# Altium PCB FAFMACMU_ControlPanel-V3-031115.PcbDoc (part 2 of 3)
Units mm, origin at the board's own origin, x right, y up, seen from the top; angles counter-clockwise.
Board outline 264 x 75.64 mm, 2 copper layers (Top Layer, Bottom Layer), stack 1.66 mm thick; 185 components, 162 nets, 766 pads, 792 vias.
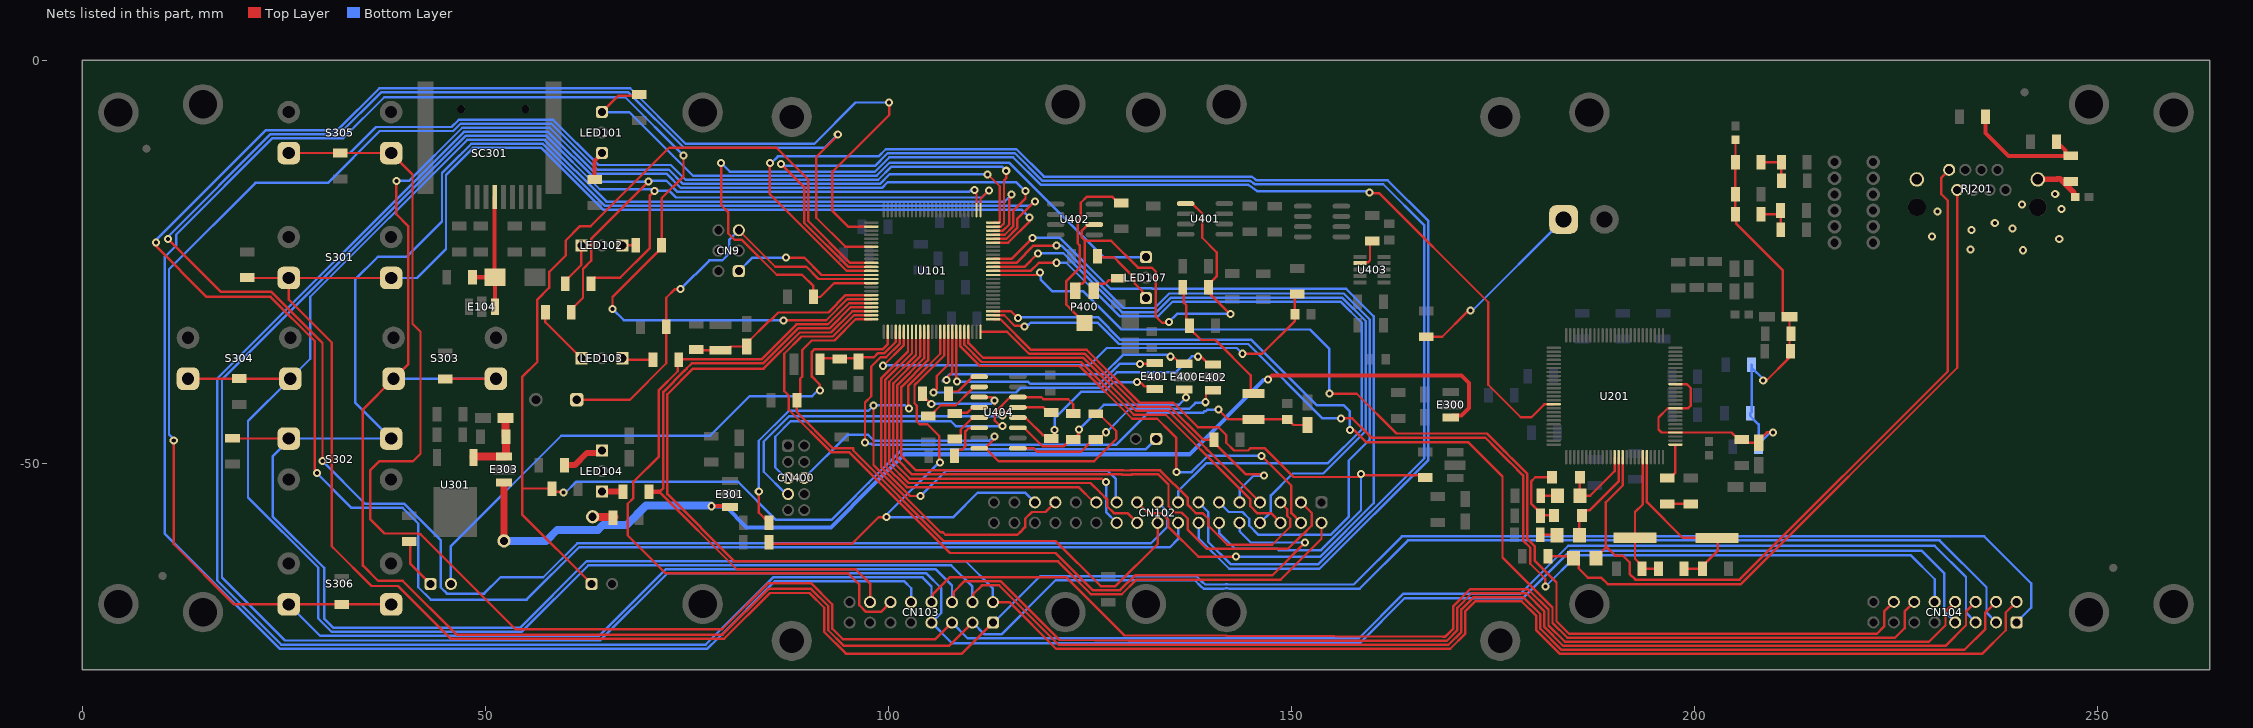
[diagram p2: the nets of this part, all layers, seen from the top]

## Via types
v1: diameter 1, hole 0.5, Top Layer to Bottom Layer, tented both sides, 636 vias
v2: diameter 1, hole 0.5, Top Layer to Bottom Layer, 146 vias
v3: diameter 1.2, hole 0.7, Top Layer to Bottom Layer, tented top, 9 vias
v4: diameter 1.2, hole 0.7, Top Layer to Bottom Layer, 1 vias

## Nets (pads, with @x,y where several pads share a name; then routed paths per layer and width w, separated by ;. In a path a pad name is that pad's centre, name@x,y a point inside that pad or via, vN(x,y) a via of type N, cw(c..) or ccw(c..) an arc to the next point about the centre after c; other vN are vias at no path point) (continued)
GNDA: C212.1 C213.1 C214.1 C218.2 C219.1 C222.2 C223.1 C224.1 C225.1 C226.1 C227.1 FT202.2 U201.4 U201.10 U201.16 | length 75.8
  Top Layer w0.3: U201.16@197.69,-40.21 199.08,-40.21 199.6,-40.73 199.6,-42.86 199.25,-43.21 U201.10@197.69,-43.21 196.733,-43.21 195.58,-44.363 195.58,-45.82 195.97,-46.21 U201.4@197.69,-46.21 204.66,-46.21 205.55,-47.1 C219.1@205.9,-47.1 206.28,-47.48 C218.2@208.03,-47.48 208.03,-47.2 209.03,-46.2 v2(209.77,-46.2) ; FT202.2@205.13,-9.9 205.13,-12.66 C225.1@205.12,-12.67 C226.1@205.12,-16.66 C227.1@205.12,-19.11 205.204,-19.194 205.204,-20.284 211.012,-26.092 211.012,-31.4 211.462,-31.85 C222.2@211.83,-31.85 211.83,-36.908 208.888,-39.85 208.822,-39.784 v2(208.574,-39.784)
  Bottom Layer w0.3: C212.1@207.129,-37.793 C212.1@207.129,-38.143 ; C214.1@208,-47.99 C214.1@208,-47.64 ; v2(208.574,-39.784) 208.574,-39.588 C212.1@207.129,-38.143 ; v2(209.77,-46.2) 209.44,-46.2 C214.1@208,-47.64 ; C212.1@207.129,-38.143 207.129,-43.681 206.94,-43.87 206.94,-44.14 208,-45.2 C214.1@208,-47.64
NetC100_2: C100.2 C115.1 L100.2 U101.5 | length 73.5
  Top Layer w0.3: v2(97.14,-47.45) 97.14,-42.49 97.91,-41.72 97.91,-38.039 99.079,-36.87 99.764,-36.87 101.47,-35.164 U101.5@101.47,-33.72 ; v2(141,-43.38) 142.2,-44.58 149.51,-44.58 C115.1@149.54,-44.61 149.64,-44.61 150.31,-45.28 C100.2@152.04,-45.28
  Bottom Layer w0.3: v2(97.14,-47.45) 97.274,-47.584 97.91,-47.584 98.066,-47.74 128.293,-47.74 132.263,-43.77 139.057,-43.77 139.276,-43.55 139.43,-43.55 139.6,-43.38 v2(141,-43.38)
NetC101_1: C101.1 C102.1 L101.2 U101.4 | length 11.7
  Top Layer w0.3: L101.2@91.5,-37.32 91.8,-37.02 93.96,-37.02 96.09,-37.02 96.21,-36.9 98.22,-36.9 98.75,-36.37 99.557,-36.37 100.97,-34.957 U101.4@100.97,-33.72
NetC103_1: C103.1 C104.2 L102.2 U101.94 | length 24.8
  Top Layer w0.3: C104.2@76.21,-35.93 76.28,-36 L102.2@79.21,-36 80.01,-36 80.47,-35.54 C103.1@82.46,-35.54 82.46,-35.14 85.3,-32.3 85.4,-32.3 86.38,-31.32 92.588,-31.32 94.738,-29.17 U101.94@97.92,-29.17
NetC215_1: C215.1 R210.1 U201.95 X201.1 | length 16.6
  Top Layer w0.3: U201.95@193.64,-49.26 193.64,-55.11 192.67,-56.08 X201.1@192.67,-59.26 192.67,-61.88 193.55,-62.76 C215.1@193.55,-63.11 R210.1@195.56,-63.11
NetC216_1: C216.1 R210.2 U201.96 X201.2 | length 23
  Top Layer w0.3: U201.96@194.14,-49.26 194.14,-54.84 198.585,-59.285 X201.2@202.83,-59.285 202.92,-59.375 202.92,-60.9 201.06,-62.76 C216.1@201.06,-63.11 R210.2@198.76,-63.11
NetC225_2: C225.2 R211.2 R212.2 | length 4.8
  Top Layer w0.3: C225.2@208.32,-12.67 R212.2@210.82,-12.67 210.82,-14.95 R211.2@210.84,-14.97
NetC227_2: C227.2 R213.1 R214.1 | length 5
  Top Layer w0.3: C227.2@208.32,-19.11 210.33,-19.11 R213.1@210.73,-18.71 ; R213.1@210.73,-18.67 R213.1@210.73,-18.71 ; R214.1@210.74,-21.05 210.73,-21.04 R213.1@210.73,-18.71
NetC228_1: C228.1 FT204.2 RJ201.9 RJ201.10 | length 5.9
  Top Layer w0.7: RJ201.9@242.64,-14.82 242.64,-14.88 242.735,-14.785 245.015,-14.785 245.05,-14.75 245.4,-14.75 247.09,-16.44 247.09,-16.82 247.24,-16.97 FT204.2@247.29,-16.97
  other v1: 240.8,-23.6 234.3,-23.5 245.3,-22.2 229.5,-21.9 234.4,-21.1 239.5,-20.9 237.3,-20.2 230.2,-18.8 245.6,-18.5 240.7,-17.9 244.8,-16.6
NetC228_2: C228.2 R215.1 R216.1 | length 15.8
  Top Layer w0.5: R215.1@236.14,-7.01 236.14,-9.03 238.99,-11.88 C228.2@246.36,-11.88 ; R216.1@245.14,-10.31 246.06,-11.23 246.06,-11.58 C228.2@246.36,-11.88 ; C228.2@246.71,-11.88 C228.2@246.36,-11.88
NetC303_1: C303.1 C304.2 E303.3 U301.1 | length 8.9
  Top Layer w1: U301.1@48.585,-49.295 48.585,-49.2 52.325,-49.2 52.61,-49.2 52.61,-47.13 52.62,-47.12 C304.2@52.62,-46.73 52.57,-46.68 52.57,-46.23 52.53,-46.19 C303.1@52.53,-44.42
NetC310_1: C310.1 C311.1 E104.3 SC301.4 | length 16.4
  Top Layer w0.5: C310.1@48.45,-26.95 C311.1@51.22,-26.95 ; SC301.4@51.2,-17 51.2,-26.93 C311.1@51.22,-26.95 ; E104.3@51.21,-30.61 51.21,-26.96 C311.1@51.22,-26.95
NetC314_2: C314.2 CN103.1 CN104.1 S301.1 U101.45 | length 392.3
  Top Layer w0.3: C314.2@20.51,-27 C314.2@20.86,-27 ; C314.2@20.86,-27.04 S301.1@25.65,-27.04 ; S301.1@38.35,-27.04 S301.1@25.65,-27.04 ; CN103.1@113.01,-69.8 109.16,-73.65 94.776,-73.65 92.08,-70.954 92.08,-67.95 90.25,-66.12 85.344,-66.12 79.674,-71.79 45.73,-71.79 39.19,-65.25 35.906,-65.25 31.16,-60.504 30.98,-60.324 30.98,-35.06 25.65,-29.73 S301.1@25.65,-27.04 ; U101.45@113.02,-22.67 114.886,-22.67 117.54,-20.016 v2(117.54,-19.53)
  Bottom Layer w0.3: S301.1@25.37,-26.77 25.645,-27.045 S301.1@25.65,-27.04 ; S301.1@38.35,-27.04 41.58,-27.04 45.16,-23.46 45.16,-14.245 46.935,-12.47 47.377,-12.029 48.496,-10.91 56.984,-10.91 64.635,-18.56 116.57,-18.56 v2(117.54,-19.53) ; CN103.1@113.01,-69.8 113.12,-69.8 118.87,-64.05 138.262,-64.05 139.025,-64.814 139.378,-65.07 141.629,-65.07 cw(c142,-68.5) 142.356,-65.068 cw(c142,-68.5) 142.371,-65.07 157.781,-65.07 163.753,-59.098 235.992,-59.098 241.81,-64.916 241.81,-67.96 CN104.1@240.01,-69.76
NetC315_2: C315.2 CN103.2 CN104.2 S302.1 U101.46 | length 404.4
  Top Layer w0.3: C315.2@18.32,-46.93 C315.2@18.67,-46.93 18.7,-46.96 S302.1@25.65,-46.96 ; CN103.2@113.01,-67.26 115.06,-67.26 120.84,-73.04 169.737,-73.04 171.63,-71.147 171.63,-68.36 172.83,-67.16 178.62,-67.16 180.43,-68.97 180.43,-70.76 183.35,-73.68 235.73,-73.68 238.67,-70.74 238.67,-68.56 CN104.2@240.01,-67.22 ; U101.46@113.02,-22.17 114.678,-22.17 116.05,-20.798 116.05,-19.676 118.166,-17.56 v2(118.21,-17.56)
  Bottom Layer w0.3: CN103.2@113.01,-67.26 113.01,-65.57 109.63,-62.19 62.591,-62.19 54.331,-70.45 31.19,-70.45 30.035,-69.295 30.035,-62.997 23.65,-56.613 23.65,-49.18 25.87,-46.96 S302.1@38.35,-46.96 33.88,-42.49 33.88,-27.23 36.69,-24.42 40.263,-24.42 44.66,-20.023 44.66,-14.038 46.728,-11.97 47.17,-11.529 48.289,-10.41 57.192,-10.41 64.842,-18.06 117.61,-18.06 118.11,-17.56 v2(118.21,-17.56)
NetC316_2: C316.2 CN103.3 CN104.3 S303.1 U101.47 | length 389
  Top Layer w0.3: v2(39,-15) 39,-19.14 40.497,-20.637 40.497,-37.693 S303.1@38.65,-39.54 34.84,-43.35 34.84,-62.72 36.72,-64.6 39.77,-64.6 46.46,-71.29 79.467,-71.29 85.147,-65.61 90.447,-65.61 92.58,-67.743 92.58,-70.747 94.483,-72.65 107.62,-72.65 CN103.3@110.47,-69.8 ; C316.2@45.03,-39.54 C316.2@45.06,-39.57 45.09,-39.54 S303.1@51.35,-39.54 ; U101.47@113.02,-21.67 114.471,-21.67 115.55,-20.591 115.55,-18.67 117.05,-17.17 v2(117.05,-16.27)
  Bottom Layer w0.3: S303.1@38.65,-39.54 S303.1@51.35,-39.54 ; v2(39,-15) 40.577,-15 47.167,-8.41 58.02,-8.41 63.7,-14.09 72.516,-14.09 74.286,-15.86 99.24,-15.86 99.96,-15.14 115.86,-15.14 116.99,-16.27 v2(117.05,-16.27) ; CN103.3@110.47,-69.8 110.498,-69.8 111.95,-71.252 114.088,-71.252 120.79,-64.55 138.055,-64.55 138.818,-65.314 138.905,-65.4 139.171,-65.57 141.657,-65.57 cw(c142,-68.5) 142.327,-65.568 cw(c142,-68.5) 142.343,-65.57 158.518,-65.57 164.49,-59.598 230.452,-59.598 236.27,-65.416 236.27,-68.56 CN104.3@237.47,-69.76
NetC317_2: C317.2 CN103.4 CN104.4 S304.1 U101.48 | length 395.4
  Top Layer w0.3: S304.1@13.15,-39.54 C317.2@19.17,-39.54 ; C317.2@19.17,-39.53 C317.2@19.52,-39.53 19.53,-39.54 S304.1@25.85,-39.54 ; CN103.4@110.47,-67.26 110.564,-67.166 110.564,-66.256 111.64,-65.18 113.79,-65.18 121.15,-72.54 169.53,-72.54 171.13,-70.94 171.13,-68.153 172.623,-66.66 178.83,-66.66 180.93,-68.76 180.93,-70.553 183.557,-73.18 233.52,-73.18 236.13,-70.57 236.13,-68.56 CN104.4@237.47,-67.22 ; U101.48@113.02,-21.17 114.264,-21.17 115.05,-20.384 115.05,-17.26 115.33,-16.98 v2(115.33,-16.71)
  Bottom Layer w0.3: CN103.4@110.47,-67.26 110.47,-65.32 107.84,-62.69 62.798,-62.69 54.538,-70.95 30.983,-70.95 29.31,-69.277 29.31,-62.98 20.59,-54.26 20.59,-44.8 S304.1@25.85,-39.54 28.321,-37.069 28.321,-29.377 47.788,-9.91 57.399,-9.91 65.049,-17.56 114.48,-17.56 v2(115.33,-16.71)
NetC318_2: C318.2 CN103.5 CN104.5 S305.1 U101.49 | length 392.3
  Top Layer w0.3: S305.1@25.65,-11.54 C318.2@32.02,-11.54 S305.1@38.35,-11.54 40.997,-14.187 40.997,-32.727 41.99,-33.72 41.99,-48.85 41.04,-49.8 36.85,-49.8 35.77,-50.88 35.77,-56.99 37.52,-58.74 41.676,-58.74 41.776,-58.84 42.01,-58.84 42.56,-59.39 53.784,-70.614 79.436,-70.614 85.16,-64.89 90.434,-64.89 93.08,-67.536 93.08,-70.54 94.385,-71.845 105.885,-71.845 CN103.5@107.93,-69.8 ; U101.49@113.02,-20.67 113.977,-20.67 114.38,-20.267 114.38,-14.935 114.66,-14.655 v2(114.66,-13.74)
  Bottom Layer w0.3: S305.1@25.65,-11.54 33.245,-11.54 36.478,-8.307 45.855,-8.307 46.752,-7.41 58.453,-7.41 64.063,-13.02 73.04,-13.02 74.88,-14.86 98.783,-14.86 100.413,-13.23 114.15,-13.23 v2(114.66,-13.74) ; CN103.5@107.93,-69.8 109.882,-71.752 158.388,-71.752 163.905,-66.235 178.425,-66.235 184.39,-60.27 229.84,-60.27 233.73,-64.16 233.73,-68.56 CN104.5@234.93,-69.76
NetC319_2: C319.2 CN103.6 CN104.6 S306.1 U101.50 | length 417.6
  Top Layer w0.3: v2(11.38,-47.2) 11.38,-60.07 18.85,-67.54 S306.1@25.65,-67.54 32.2,-67.54 C319.2@32.21,-67.53 32.22,-67.54 S306.1@38.35,-67.54 ; CN103.6@107.93,-67.26 108.16,-67.03 108.16,-65.96 109.44,-64.68 113.997,-64.68 121.269,-71.953 121.392,-71.954 129.84,-72.04 169.323,-72.04 170.63,-70.733 170.63,-67.946 172.416,-66.16 179.193,-66.16 181.43,-68.397 181.43,-70.346 183.764,-72.68 231.167,-72.68 233.73,-70.117 233.73,-68.42 CN104.6@234.93,-67.22 ; v2(112.336,-14.18) 112.37,-14.18 113.85,-15.66 113.85,-20.09 113.77,-20.17 U101.50@113.02,-20.17
  Bottom Layer w0.3: v2(11.38,-47.2) 11.38,-47.037 10.79,-46.447 10.79,-25.954 21.504,-15.24 30.51,-15.24 36.943,-8.807 46.063,-8.807 46.96,-7.91 58.246,-7.91 63.926,-13.59 72.79,-13.59 74.56,-15.36 98.99,-15.36 100.204,-14.146 112.303,-14.146 v2(112.336,-14.18) ; S306.1@25.65,-67.54 29.56,-71.45 64.143,-71.45 72.403,-63.19 105.94,-63.19 107.93,-65.18 CN103.6@107.93,-67.26
NetC403_2: C403.2 R402.1 U101.6 | length 62.7
  Top Layer w0.3: v2(99.362,-37.93) 99.411,-37.93 101.97,-35.371 U101.6@101.97,-33.72 ; v2(143.97,-36.44) 146.398,-36.44 150.47,-32.368 C403.2@150.47,-31.62 ; C403.2@150.47,-31.52 C403.2@150.47,-31.62 ; R402.1@150.47,-29.083 C403.2@150.47,-31.62
  Bottom Layer w0.3: v2(99.362,-37.93) 99.432,-37.86 125,-37.86 127.13,-35.73 143.26,-35.73 v2(143.97,-36.44)
NetC404_1: C404.1 U403.2 | length 3.9
  Top Layer w0.3: U403.2@158.54,-25.21 158.64,-25.11 159.526,-25.11 159.79,-24.846 159.79,-22.73 C404.1@160.05,-22.47
NetC406_1: C406.1 R412.2 | length 23
  Top Layer w0.3: R412.2@166.79,-34.34 168.75,-34.34 171.773,-31.317 171.794,-31.317 172.061,-31.05 v2(172.25,-31.05)
  Bottom Layer w0.3: v2(172.25,-31.05) 172.53,-31.05 C406.1@183.8,-19.78
NetC408_1: C408.1 U404.3 | length 12.8
  Top Layer w0.3: C408.1@104.28,-41.42 104.28,-41.575 v2(105.36,-42.655) ; U404.3@111.31,-41.82 112.86,-41.82 113.284,-42.244 113.256,-42.271 113.256,-42.7 113.22,-42.664 v2(113.22,-42.24)
  Bottom Layer w0.3: v2(105.36,-42.655) 112.805,-42.655 v2(113.22,-42.24)
NetC408_2: C408.2 U404.1 | length 4.7
  Top Layer w0.3: C408.2@107.48,-41.42 107.78,-41.12 108.687,-41.12 109.85,-39.956 109.85,-39.94 110.51,-39.28 U404.1@111.31,-39.28
NetC409_1: C409.1 U404.2 | length 7.5
  Top Layer w0.3: C409.1@105.31,-44.05 106.53,-42.83 108.391,-42.83 110.35,-40.871 110.35,-40.71 110.51,-40.55 U404.2@111.31,-40.55
NetC410_1: C410.1 U404.5 | length 5.2
  Top Layer w0.3: C410.1@107.58,-47.13 107.93,-47.13 C410.1@108.135,-46.925 ; C410.1@108.25,-46.95 108.6,-46.95 109,-46.55 109,-45.87 110.51,-44.36 U404.5@111.31,-44.36
NetC410_2: C410.2 U404.4 | length 4
  Top Layer w0.3: C410.2@107.58,-43.93 C410.2@108.25,-43.93 ; C410.2@108.25,-43.75 109.85,-43.75 110.51,-43.09 U404.4@111.31,-43.09
NetC412_2: C412.2 U404.6 | length 5.8
  Top Layer w0.3: C412.2@108.24,-49.12 108.24,-48.77 108.64,-48.37 109.138,-48.37 109.6,-47.908 109.6,-46.07 109.983,-45.687 111.253,-45.687 U404.6@111.31,-45.63
NetCN9_1: CN9.1 U101.89 | length 18
  Top Layer w0.3: v2(87.34,-24.51) 89.6,-24.51 91.76,-26.67 U101.89@97.92,-26.67
  Bottom Layer w0.3: CN9.1@81.48,-26.2 83.17,-24.51 v2(87.34,-24.51)
NetCN9_5: CN9.5 R101.1 S101.1 U101.90 | length 53.5
  Top Layer w0.3: S101.1@61.38,-42.14 67.966,-42.14 72.48,-37.626 R101.1@72.48,-33.07 72.48,-29.5 73.55,-28.43 v2(74.27,-28.43) ; CN9.5@81.48,-21.12 86,-25.64 89.86,-25.64 91.39,-27.17 92.35,-27.17 U101.90@97.92,-27.17
  Bottom Layer w0.3: v2(74.27,-28.43) 77.84,-24.86 79.437,-24.86 80.28,-24.017 80.28,-22.32 CN9.5@81.48,-21.12
NetCN102_2: CN102.2 U101.98 | length 133.1
  Top Layer w0.3: U101.98@97.92,-31.17 95.567,-31.17 92.937,-33.8 89.047,-33.8 84.567,-38.28 75.81,-38.28 72.63,-41.46 72.63,-53.863 80.967,-62.2 121.1,-62.2 125.17,-66.27 129,-66.27 130.81,-64.46 148.71,-64.46 153.77,-59.4 CN102.2@153.77,-57.41
NetCN102_3: CN102.3 U101.11 | length 80.3
  Top Layer w0.3: U101.11@104.47,-33.72 104.47,-36.994 101.15,-40.314 101.15,-49.58 102.98,-51.41 129.001,-51.41 129.02,-51.429 130.221,-51.429 130.24,-51.41 133.55,-51.41 134.79,-52.65 134.79,-55.367 135.563,-56.14 136.417,-56.14 137.19,-56.913 137.19,-58.31 139.52,-60.64 149.616,-60.64 151.346,-58.91 151.427,-58.91 152.57,-57.767 152.57,-56.21 CN102.3@151.23,-54.87
NetCN102_4: CN102.4 U101.20 | length 59.3
  Top Layer w0.3: U101.20@108.97,-33.72 108.97,-35.534 111.396,-37.96 123.737,-37.96 130.287,-44.51 133.404,-44.51 134.97,-46.076 135.77,-46.876 v2(135.77,-51.13) ; v2(146.31,-49.1) 150.03,-52.82 150.03,-56.21 CN102.4@151.23,-57.41
  Bottom Layer w0.3: v2(135.77,-51.13) 137.652,-51.13 139.682,-49.1 v2(146.31,-49.1)
NetCN102_5: CN102.5 U101.12 | length 75.1
  Top Layer w0.3: U101.12@104.97,-33.72 104.97,-37.229 101.65,-40.549 101.65,-49.113 103.446,-50.91 129.208,-50.91 129.227,-50.929 130.014,-50.929 130.033,-50.91 133.757,-50.91 137.19,-54.343 137.19,-55.227 138.173,-56.21 139.027,-56.21 139.73,-56.913 139.73,-57.767 142.103,-60.14 147.657,-60.14 149.89,-57.907 149.89,-56.913 149.53,-56.553 149.53,-55.727 148.69,-54.887 CN102.5@148.69,-54.87
NetCN102_6: CN102.6 U101.21 | length 50.5
  Top Layer w0.3: U101.21@109.47,-33.72 109.47,-35.327 111.603,-37.46 123.944,-37.46 130.494,-44.01 134.447,-44.01 142.917,-52.48 144.95,-54.513 144.95,-55.367 145.793,-56.21 147.49,-56.21 CN102.6@148.69,-57.41
NetCN102_7: CN102.7 U101.22 | length 45.8
  Top Layer w0.3: U101.22@109.97,-33.72 109.97,-35.12 111.81,-36.96 124.23,-36.96 130.78,-43.51 134.79,-43.51 139.45,-48.17 139.45,-48.176 139.714,-48.44 139.72,-48.44 CN102.7@146.15,-54.87
NetCN102_8: CN102.8 U101.39 | length 84.6
  Top Layer w0.3: U101.39@113.02,-25.67 116.93,-25.67 v2(118.62,-23.98)
  Bottom Layer w0.3: v2(118.62,-23.98) 121.763,-23.98 122.32,-24.537 122.32,-24.581 129.009,-31.27 133.3,-31.27 135.1,-29.47 156.333,-29.47 159.26,-32.397 159.26,-46.029 153.989,-51.3 150.2,-51.3 147.49,-54.01 147.49,-56.07 CN102.8@146.15,-57.41
NetCN102_9: CN102.9 R107.1 U101.25 | length 48.1
  Top Layer w0.3: U101.25@111.47,-33.72 114.773,-33.72 117.513,-36.46 124.437,-36.46 130.987,-43.01 134.997,-43.01 139.077,-47.09 R107.1@140.45,-47.09 140.45,-47.44 144.42,-51.41 146.114,-51.41 146.13,-51.426 146.506,-51.426 v2(146.64,-51.56)
  Bottom Layer w0.3: CN102.9@143.61,-54.87 143.61,-53.31 145.36,-51.56 v2(146.64,-51.56)
NetCN102_10: CN102.10 U101.99 | length 105.5
  Top Layer w0.3: U101.99@97.92,-31.67 95.774,-31.67 93.144,-34.3 89.254,-34.3 87.12,-36.434 87.12,-41.073 87.68,-41.633 87.68,-43.38 92.98,-48.68 95.2,-48.68 107.68,-61.16 120.767,-61.16 125.377,-65.77 128.793,-65.77 130.633,-63.93 147.67,-63.93 v2(151.74,-59.86)
  Bottom Layer w0.3: CN102.10@143.61,-57.41 143.61,-58.47 145,-59.86 v2(151.74,-59.86)
NetCN102_11: CN102.11 U101.40 | length 97.7
  Top Layer w0.3: U101.40@113.02,-25.17 115.92,-25.17 118.06,-23.03 120.91,-23.03 v2(120.92,-23.02)
  Bottom Layer w0.3: v2(120.92,-23.02) 121.511,-23.02 122.82,-24.329 122.82,-24.373 129.217,-30.77 133.093,-30.77 134.893,-28.97 156.54,-28.97 159.76,-32.19 159.76,-47.09 157.14,-49.71 157.14,-56.68 154.91,-58.91 145.953,-58.91 144.81,-57.767 144.81,-56.913 143.967,-56.07 142.27,-56.07 CN102.11@141.07,-54.87
NetCN102_12: CN102.12 R106.1 U101.26 | length 88.6
  Top Layer w0.3: U101.26@113.02,-32.17 113.93,-32.17 117.72,-35.96 124.65,-35.96 131.2,-42.51 135.38,-42.51 138.438,-45.568 141.014,-45.568 141.964,-46.518 141.964,-47.49 142.914,-48.44 144.693,-48.44 144.983,-48.15 146.704,-48.15 150.284,-51.73 v2@158.67,-51.73 ; v2(158.67,-51.34) 158.859,-51.34 159.009,-51.49 R106.1@166.3,-51.49
  Bottom Layer w0.3: CN102.12@141.07,-57.41 141.07,-58.683 143.027,-60.64 148.287,-60.64 148.457,-60.81 153.717,-60.81 158.67,-55.857 v2(158.67,-51.34)
NetCN102_13: CN102.13 U101.87 | length 171
  Top Layer w0.3: v2(86.719,-12.91) 86.729,-12.91 89.59,-15.771 89.59,-20.183 95.077,-25.67 U101.87@97.92,-25.67
  Bottom Layer w0.3: v2(86.719,-12.91) 86.919,-12.91 87.139,-13.13 98.367,-13.13 99.927,-11.57 115.729,-11.57 119.119,-14.96 144.879,-14.96 144.958,-15.017 145.314,-15.273 145.35,-15.304 145.466,-15.42 161.44,-15.42 166.53,-20.51 166.53,-49.411 153.401,-62.54 142.495,-62.54 139.73,-59.775 139.73,-56.07 CN102.13@138.53,-54.87
NetCN102_14: CN102.14 U101.88 | length 173.7
  Top Layer w0.3: v2(85.33,-12.77) 85.33,-16.63 94.87,-26.17 U101.88@97.92,-26.17
  Bottom Layer w0.3: v2(85.33,-12.77) 85.516,-12.77 86.326,-11.96 98.83,-11.96 99.72,-11.07 115.936,-11.07 119.326,-14.46 145.087,-14.46 145.165,-14.517 145.524,-14.776 145.56,-14.807 145.673,-14.92 161.98,-14.92 167.03,-19.97 167.03,-49.618 153.528,-63.12 142.321,-63.12 138.53,-59.329 CN102.14@138.53,-57.41
NetCN102_15: CN102.15 U101.38 | length 91.3
  Top Layer w0.3: U101.38@113.02,-26.17 117.686,-26.17 118.706,-25.15 v2(120.883,-25.15)
  Bottom Layer w0.3: v2(120.883,-25.15) 122.106,-25.15 128.726,-31.77 133.521,-31.77 135.321,-29.97 156.126,-29.97 158.76,-32.604 158.76,-45.822 154.532,-50.05 139.439,-50.05 135.99,-53.499 CN102.15@135.99,-54.87
NetCN102_16: CN102.16 U101.77 | length 291.5
  Top Layer w0.3: v2(9.18,-22.66) 9.18,-22.7 8.974,-22.906 15.458,-29.39 23.392,-29.39 28.89,-34.888 28.89,-50.81 29.15,-51.071 v2(29.15,-51.26) ; U101.77@97.92,-20.67 95.027,-20.67 93.09,-18.733 93.09,-13.87 100.14,-6.82 v2(100.14,-5.27)
  Bottom Layer w0.3: v2(29.15,-51.26) 33.45,-55.56 39.784,-55.56 41.72,-57.496 41.72,-65.407 43.265,-66.951 55.156,-66.951 61.657,-60.45 134.98,-60.45 135.99,-59.44 CN102.16@135.99,-57.41 ; v2(100.14,-5.27) 95.98,-5.27 90.86,-10.39 74.887,-10.39 68.007,-3.51 36.893,-3.51 31.71,-8.693 22.823,-8.693 9.18,-22.336 v2(9.18,-22.66) ; v2@9.18,-22.69 v2(9.18,-22.66) ; v2@9.18,-22.69 v2(9.18,-22.66) ; v2@9.18,-22.69 8.974,-22.896 v2@9.18,-22.69
NetCN102_17: CN102.17 U101.82 | length 275.2
  Top Layer w0.3: v2(10.67,-22.19) 17.25,-28.77 23.49,-28.77 29.84,-35.12 v2(29.84,-49.76) ; v2(93.76,-9.226) 93.76,-9.352 91.09,-12.022 91.09,-19.562 94.698,-23.17 U101.82@97.92,-23.17
  Bottom Layer w0.3: v2@10.525,-22.045 23.377,-9.193 31.917,-9.193 37.1,-4.01 67.8,-4.01 74.68,-10.89 92.096,-10.89 v2(93.76,-9.226) ; v2(29.84,-49.76) 35.14,-55.06 39.991,-55.06 44.49,-59.559 44.49,-65.417 45.273,-66.2 49.886,-66.2 51.916,-64.17 57.23,-64.17 61.45,-59.95 132.607,-59.95 134.65,-57.907 134.65,-56.07 CN102.17@133.45,-54.87
NetCN102_18: CN102.18 R108.2 U101.100 | length 76.8
  Top Layer w0.3: U101.100@97.92,-32.17 95.981,-32.17 93.351,-34.8 90.539,-34.8 89.35,-35.989 89.35,-39.276 89.08,-39.546 89.08,-41.8 R108.2@88.68,-42.2 88.68,-43.673 93.187,-48.18 95.673,-48.18 95.673,-48.446 106.897,-59.67 107.163,-59.67 113.77,-59.67 120.78,-59.67 126.38,-65.27 128.216,-65.27 133.45,-60.036 CN102.18@133.45,-57.41
NetCN102_19: CN102.19 U101.41 | length 111
  Top Layer w0.3: U101.41@113.02,-24.67 115.33,-24.67 v2(117.93,-22.07) ; CN102.19@130.91,-54.87 132.25,-56.21 133.947,-56.21 134.738,-57.001 134.738,-57.855 138.503,-61.62 143.14,-61.62 v2(143.17,-61.59)
  Bottom Layer w0.3: v2(117.93,-22.07) 121.313,-22.07 127.633,-28.39 131.233,-28.39 131.283,-28.34 132.717,-28.34 132.767,-28.39 156.85,-28.39 160.26,-31.8 160.26,-54.974 153.594,-61.64 143.22,-61.64 v2(143.17,-61.59)
NetCN102_20: CN102.20 U101.9 | length 52
  Top Layer w0.3: U101.9@103.47,-33.72 103.47,-36.58 100.14,-39.91 100.14,-50.084 102.536,-52.48 104.009,-52.48 125.13,-52.48 126.32,-53.67 126.327,-53.67 127.17,-54.513 127.17,-55.367 128.013,-56.21 129.71,-56.21 CN102.20@130.91,-57.41
NetCN102_21: CN102.21 U101.7 | length 53.4
  Top Layer w0.3: U101.7@102.47,-33.72 102.47,-36.166 99.14,-39.496 99.14,-50.499 102.731,-54.09 v2(104.04,-54.09)
  Bottom Layer w0.3: v2(104.04,-54.09) 107.15,-50.98 127.25,-50.98 128.27,-52 128.27,-54.77 CN102.21@128.37,-54.87
NetCN102_22: CN102.22 U101.10 | length 50.6
  Top Layer w0.3: U101.10@103.97,-33.72 103.97,-36.787 100.64,-40.117 100.64,-49.877 102.713,-51.95 104.186,-51.95 126.524,-51.95 126.934,-52.36 v2(127.05,-52.36)
  Bottom Layer w0.3: v2(127.05,-52.36) 127.05,-56.09 CN102.22@128.37,-57.41
NetCN102_23: CN102.23 U101.8 | length 46
  Top Layer w0.3: U101.8@102.97,-33.72 102.97,-36.373 99.64,-39.703 99.64,-50.292 102.338,-52.99 123.637,-52.99 125.517,-54.87 CN102.23@125.83,-54.87
NetCN102_27: CN102.27 R105.1 U101.15 | length 78.4
  Top Layer w0.3: v2(83.96,-53.55) 83.96,-56.15 R105.1@85.23,-57.42 ; v2(98.19,-42.88) 98.19,-50.256 106.534,-58.6 106.8,-58.6 107.1,-58.9 116.06,-58.9 116.36,-58.6 117.01,-57.95 117.01,-56.913 117.847,-56.076 119.544,-56.076 CN102.27@120.75,-54.87 ; v2(102.6,-43.25) 102.48,-43.13 102.48,-40.427 103.337,-39.57 106.47,-36.437 U101.15@106.47,-33.72
  Bottom Layer w0.3: v2(83.96,-53.55) 83.96,-47.243 87.673,-43.53 97.54,-43.53 98.24,-42.83 102.074,-42.83 102.494,-43.25 v2(102.6,-43.25)
NetCN102_29: CN102.29 R104.1 U101.16 | length 65.4
  Top Layer w0.3: R104.1@85.3,-60.39 85.7,-59.99 95.55,-59.99 98.838,-56.702 v2(99.826,-56.702) ; v2(106.45,-49.96) 106.35,-49.86 106.35,-46.644 104.889,-45.182 103.916,-45.182 103.55,-44.816 103.55,-42.857 103.28,-42.587 103.28,-40.334 103.544,-40.07 103.56,-40.07 106.97,-36.66 U101.16@106.97,-33.72
  Bottom Layer w0.3: v2(106.45,-49.96) 106.41,-50 106.25,-50 99.826,-56.424 v2(99.826,-56.702) 108.098,-56.702 111.13,-53.67 117.01,-53.67 CN102.29@118.21,-54.87
NetCN103_7: CN103.7 CN104.7 R310.1 U101.51 | length 396.4
  Top Layer w0.3: R310.1@63.15,-27.76 63.15,-27.41 63.55,-27.01 66.756,-27.01 70.45,-23.316 70.45,-16.8 v2@71.303,-15.947 ; U101.51@111.47,-18.62 111.47,-17.21 v2(112.5,-16.18)
  Bottom Layer w0.3: v2(112.5,-16.18) 111.62,-17.06 73.69,-17.06 72.87,-16.24 v2(71.01,-16.24) 70.81,-16.04 64.236,-16.04 57.606,-9.41 47.581,-9.41 17.37,-39.621 17.37,-64.19 25.2,-72.02 64.28,-72.02 72.61,-63.69 104.75,-63.69 106.59,-65.53 106.59,-68.6 CN103.7@105.39,-69.8 107.96,-72.37 158.477,-72.37 164.097,-66.75 178.77,-66.75 184.66,-60.86 228.21,-60.86 231.05,-63.7 231.05,-68.42 CN104.7@232.39,-69.76
NetCN103_8: CN103.8 CN104.8 R311.1 U101.52 | length 397.8
  Top Layer w0.3: R311.1@60.69,-31.31 60.69,-30.96 62.15,-29.5 62.15,-25.917 63.16,-24.907 63.16,-22.22 v2(70.29,-15.09) ; CN103.8@105.39,-67.26 105.534,-67.116 105.534,-66.306 107.69,-64.15 122.06,-64.15 129.26,-71.35 141.977,-71.45 ccw(c142,-68.5) 141.99,-71.45 168.867,-71.54 169.116,-71.54 169.204,-71.452 170.13,-70.526 170.13,-67.739 172.209,-65.66 179.4,-65.66 181.93,-68.19 181.93,-70.139 183.971,-72.18 229.127,-72.18 231.19,-70.117 231.19,-68.42 CN104.8@232.39,-67.22 ; v2(110.72,-16.11) 110.72,-16.399 110.97,-16.65 U101.52@110.97,-18.15
  Bottom Layer w0.3: v2(70.29,-15.09) 63.993,-15.09 57.813,-8.91 47.374,-8.91 16.77,-39.514 16.77,-64.573 24.717,-72.52 77.39,-72.52 85.72,-64.19 104.28,-64.19 105.39,-65.3 CN103.8@105.39,-67.26 ; v2@70.29,-14.97 72.5,-14.97 73.89,-16.36 110.058,-16.36 110.308,-16.11 v2(110.72,-16.11)
NetCN103_10: CN103.10 R320.1 U101.95 | length 271.2
  Top Layer w0.3: v2(65.81,-30.87) 65.81,-29.42 71.9,-23.33 R320.1@71.9,-22.98 71.9,-17.152 74.62,-14.432 v2(74.62,-11.84) ; v2(87.04,-32.29) 92.325,-32.29 94.945,-29.67 U101.95@97.92,-29.67
  Bottom Layer w0.3: v2(65.81,-30.87) 67.23,-32.29 v2(87.04,-32.29) ; v2(74.62,-11.84) 67.393,-4.613 37.487,-4.613 32.407,-9.693 23.647,-9.693 11.69,-21.65 11.69,-23.01 10.29,-24.41 10.29,-58.8 23.24,-71.75 24.51,-73.02 77.597,-73.02 78.867,-71.75 85.927,-64.69 102.03,-64.69 102.88,-65.54 102.88,-67.161 102.816,-67.226 CN103.10@102.85,-67.26
NetCN103_12: CN103.12 R321.1 U101.96 | length 89.7
  Top Layer w0.3: R321.1@74.03,-37.19 73.91,-37.31 73.91,-38.606 71.562,-40.954 71.562,-49.168 68.4,-52.33 68.4,-54.357 67.703,-55.053 67.703,-58.983 72.302,-63.582 72.39,-63.67 72.639,-63.67 76.982,-63.65 cw(c77,-67.5) 77.036,-63.65 79.405,-63.67 95.05,-63.67 96.43,-65.05 96.43,-67.617 97.273,-68.46 99.11,-68.46 CN103.12@100.31,-67.26 ; R321.1@74.03,-37.14 84.292,-37.14 88.632,-32.8 92.523,-32.8 95.153,-30.17 U101.96@97.92,-30.17
NetCN103_14: CN103.14 R319.1 U101.97 | length 78.5
  Top Layer w0.3: R319.1@70.32,-53.704 71.764,-53.704 81.23,-63.17 95.98,-63.17 97.77,-64.96 CN103.14@97.77,-67.26 ; R319.1@70.32,-53.55 70.408,-53.462 71.758,-53.462 72.13,-53.09 72.13,-41.176 74.766,-38.54 75.03,-38.276 75.03,-38.249 75.639,-37.64 84.499,-37.64 88.839,-33.3 92.73,-33.3 95.36,-30.67 U101.97@97.92,-30.67
NetCN104_10: CN104.10 U101.27 | length 143.3
  Top Layer w0.3: U101.27@113.02,-31.67 114.407,-31.67 115.716,-32.98 116.84,-32.98 v2(116.92,-33.06) ; v2(156.2,-44.46) 157.582,-44.46 159.962,-46.84 174.093,-46.84 174.92,-47.667 174.92,-47.681 177.169,-49.93 177.183,-49.93 178.78,-51.527 178.78,-59.594 179.67,-60.484 179.67,-62.493 181.54,-64.363 v1(181.54,-65.34)
  Bottom Layer w0.3: v2(116.92,-33.06) 117.109,-33.06 117.336,-32.833 117.437,-32.833 117.7,-32.57 125.99,-32.57 128.65,-35.23 144.68,-35.23 153.91,-44.46 v2(156.2,-44.46) ; v1(181.54,-65.34) 185.45,-61.43 226.86,-61.43 229.85,-64.42 CN104.10@229.85,-67.22
NetCN104_12: CN104.12 U101.28 | length 142.6
  Top Layer w0.3: U101.28@113.02,-31.17 115.25,-31.17 v2(116.11,-32.03) ; v2(157.29,-45.9) 157.82,-45.9 159.35,-47.43 171.996,-47.43 176.23,-51.664 176.23,-61.71 182.43,-67.91 182.43,-69.84 184.27,-71.68 224.92,-71.68 226.11,-70.49 226.11,-68.42 CN104.12@227.31,-67.22
  Bottom Layer w0.3: v2(116.11,-32.03) 116.24,-31.9 126.027,-31.9 128.857,-34.73 145.08,-34.73 153.16,-42.81 156.484,-42.81 157.29,-43.616 v2(157.29,-45.9)
NetCN104_14: CN104.14 U101.37 | length 145.5
  Top Layer w0.3: U101.37@113.02,-26.67 118.341,-26.67 118.641,-26.37 v2(118.83,-26.37) ; v2(154.76,-41.4) 158.154,-41.4 163.094,-46.34 174.301,-46.34 176.398,-48.438 176.398,-48.452 177.376,-49.43 177.391,-49.43 179.28,-51.319 179.28,-59.366 180.25,-60.336 180.25,-62.156 182.93,-64.836 182.93,-69.633 184.477,-71.18 200.417,-71.18 222.67,-71.18 223.57,-70.28 223.57,-68.42 CN104.14@224.77,-67.22
  Bottom Layer w0.3: v2(118.83,-26.37) 118.964,-26.504 118.964,-27.278 120.386,-28.7 124.241,-28.7 128.971,-33.43 152.35,-33.43 154.76,-35.84 v2(154.76,-41.4)
NetCN400_5: CN400.5 R414.2 U404.14 | length 50.3
  Top Layer w0.3: R414.2@122.98,-43.86 122.98,-42.72 122.35,-42.09 119.274,-42.09 119.004,-41.82 115.166,-41.82 113.26,-43.727 113.26,-44.76 113.93,-45.43 v2(114.18,-45.43) ; v2@113.87,-45.43 v2(114.18,-45.43) ; v2@113.87,-45.43 113.776,-45.524 v2@113.87,-45.43 ; v2@113.87,-45.43 v2(114.18,-45.43)
  Bottom Layer w0.3: CN400.5@87.6,-51.85 87.3,-51.85 86,-50.55 86,-46.73 87.93,-44.8 107.782,-44.8 108.412,-45.43 v2(114.18,-45.43)
NetCN400_6: CN400.6 R416.1 U404.8 | length 51.5
  Top Layer w0.3: U404.8@111.31,-48.17 U404.8@112.029,-48.17 ; v2(113.208,-46.73) 113.208,-46.991 U404.8@112.029,-48.17 ; R416.1@125.79,-43.88 126.14,-43.88 128.306,-46.046 128.306,-47.02 125.556,-49.77 113.71,-49.77 112.11,-48.17 U404.8@112.029,-48.17
  Bottom Layer w0.3: CN400.6@89.6,-51.85 94.95,-46.5 97.533,-46.5 98.273,-47.24 112.542,-47.24 113.052,-46.73 v2(113.208,-46.73)
NetCN400_7: CN400.7 R415.2 U404.13 | length 45.6
  Top Layer w0.3: v2(114.21,-44.12) 114.28,-44.12 115.31,-43.09 U404.13@116.11,-43.09 119.27,-43.09 119.92,-43.74 R415.2@120.27,-43.74
  Bottom Layer w0.3: CN400.7@87.6,-53.85 87.34,-53.85 84.57,-51.08 84.57,-47.34 87.71,-44.2 114.13,-44.2 v2(114.21,-44.12)
NetD201_1: D201.1 D202.1 R206.1 | length 9.3
  Top Layer w0.3: D202.1@182.385,-51.76 180.29,-51.76 179.78,-52.27 179.78,-55.01 180.95,-56.18 R206.1@180.95,-56.53 180.99,-56.49 D201.1@182.635,-56.49
NetD201_2: D201.2 LED203.2 U201.89 | length 12
  Top Layer w0.3: LED203.2@185.769,-58.943 185.769,-56.806 D201.2@186.085,-56.49 186.085,-56.315 186.56,-55.84 187.08,-55.84 190.64,-52.28 U201.89@190.64,-49.26
NetD202_2: D202.2 LED202.2 U201.88 | length 9.6
  Top Layer w0.3: D202.2@185.835,-51.76 185.835,-54.042 LED202.2@185.849,-54.056 187.099,-54.056 190.14,-51.015 U201.88@190.14,-49.26
NetE300_1: E300.1 E301.1 E303.1 L301.2 | length 146.2
  Top Layer w0.5: v2(78.11,-55.36) 78.12,-55.35 80.29,-55.35 E301.1@80.39,-55.45 ; v2(147.11,-39.61) 147.203,-39.61 147.653,-39.16 171.14,-39.16 172.072,-40.092 172.072,-43.186 171.138,-44.12 170.06,-44.12 E300.1@169.81,-44.37
  Top Layer w0.9: L301.2@52.35,-59.66 E303.1@52.35,-52.4
  Bottom Layer w0.5: v2(78.11,-55.36) 78.319,-55.36 79.81,-55.36 82.45,-58 92.892,-58 98.21,-52.682 101.982,-48.91 137.4,-48.91 146.604,-39.706 147.014,-39.706 v2(147.11,-39.61)
  Bottom Layer w1: L301.2@52.35,-59.66 57.587,-59.66 58.962,-58.286 64.023,-58.286 64.609,-57.7 67.575,-57.7 69.99,-55.285 v2@78.035,-55.285
NetE400_1: E400.1 U101.18 | length 39.1
  Top Layer w0.3: v2(107.251,-39.72) 106.999,-39.72 106.879,-39.84 107.97,-38.749 U101.18@107.97,-33.72 ; v2(135.036,-36.81) 135.17,-36.944 135.514,-36.944 136.25,-37.68 E400.1@136.75,-37.68
  Bottom Layer w0.3: v2@106.77,-39.84 v2@106.89,-39.72 ; v2(107.251,-39.72) v2@106.89,-39.72 ; v2(135.036,-36.81) 134.847,-36.81 134.617,-36.58 129.136,-36.58 126.755,-38.961 107.649,-38.961 v2@106.89,-39.72
NetE400_3: E400.3 R414.1 U404.11 | length 26.1
  Top Layer w0.3: U404.11@116.11,-45.63 116.874,-45.63 119.184,-47.94 121.356,-47.94 ; 121.376,-47.92 121.356,-47.94 ; R414.1@123.05,-47.06 R414.1@122.98,-47.06 123.7,-46.34 v2(123.7,-45.85) ; R414.1@123.21,-46.99 122.7,-46.99 121.75,-47.94 121.356,-47.94 ; E400.3@136.75,-40.88 136.99,-41.12 v2(136.99,-41.88)
  Bottom Layer w0.3: v2(123.7,-45.85) 126.78,-42.77 136.1,-42.77 v2(136.99,-41.88)
NetE401_1: E401.1 U101.19 | length 31.9
  Top Layer w0.3: U101.19@108.47,-33.72 108.47,-39.829 v2(108.552,-39.911) ; v2(131.24,-37.7) 132.99,-37.7 E401.1@133.08,-37.61
  Bottom Layer w0.3: v2(108.552,-39.911) 117.368,-39.911 117.627,-40.17 126.253,-40.17 128.723,-37.7 v2(131.24,-37.7)
NetE401_3: E401.3 R415.1 U404.12 | length 22.7
  Top Layer w0.3: U404.12@116.11,-44.36 116.991,-44.36 117.141,-44.51 117.17,-44.51 119.2,-46.54 119.87,-46.54 R415.1@120.27,-46.94 120.581,-46.629 120.761,-46.629 120.761,-46.489 120.761,-45.88 v2(120.67,-45.88) ; v2(130.91,-39.97) 131.044,-40.104 131.438,-40.104 131.834,-40.5 132.77,-40.5 E401.3@133.08,-40.81
  Bottom Layer w0.3: v2(120.67,-45.88) 120.67,-44.44 121.003,-44.107 123.94,-41.17 126.77,-41.17 127.97,-39.97 v2(130.91,-39.97)
NetE402_1: E402.1 U101.17 | length 45.2
  Top Layer w0.3: v2(105.64,-41.25) 106.02,-40.87 106.02,-39.227 107.47,-37.777 U101.17@107.47,-33.72 ; v2(138.459,-36.81) 138.497,-36.81 138.532,-36.845 138.865,-36.845 139.79,-37.77 E402.1@140.29,-37.77
  Bottom Layer w0.3: v2(105.64,-41.25) 115.855,-41.25 116.435,-40.67 126.46,-40.67 128.38,-38.75 135.68,-38.75 137.687,-36.743 138.366,-36.743 138.433,-36.81 v2(138.459,-36.81)
NetE402_3: E402.3 R416.2 U404.9 | length 28.1
  Top Layer w0.3: U404.9@116.11,-48.17 118.05,-48.17 118.48,-48.6 123.92,-48.6 125.44,-47.08 126.14,-47.08 127.04,-46.18 v2(127.06,-46.18) ; v2(139.382,-42.455) 139.44,-42.398 139.44,-41.32 139.79,-40.97 E402.3@140.29,-40.97
  Bottom Layer w0.3: v2(127.06,-46.18) 127.08,-46.18 129.99,-43.27 137.39,-43.27 138.13,-42.53 139.308,-42.53 v2(139.382,-42.455)
NetF301_1: F301.1 L301.1 | length 2.7
  Top Layer w1: L301.1@63.35,-56.66 63.37,-56.68 66.01,-56.68 F301.1@66.03,-56.7
NetL100_1: L100.1 R404.2 R407.2 | length 17.1
  Top Layer w0.3: R404.2@136.56,-28.19 136.67,-28.3 136.67,-30.084 137.01,-30.424 137.01,-32.55 R407.2@137.41,-32.95 137.41,-33.3 138.85,-34.74 140.62,-34.74 144.98,-39.1 144.98,-40.796
NetLED101_1: LED101.1 R314.1 | length 3.7
  Top Layer w0.5: R314.1@63.6,-14.84 63.6,-12.508 64.5,-11.608 LED101.1@64.5,-11.54
NetLED101_3: LED101.3 LED107.3 R315.2 | length 82.4
  Top Layer w0.3: LED101.3@64.5,-6.46 66.55,-4.41 69.39,-4.41 R315.2@69.5,-4.3 ; R315.2@69.15,-4.3 R315.2@69.39,-4.3
  Bottom Layer w0.3: LED101.3@64.5,-6.46 67.896,-6.46 75.796,-14.36 98.576,-14.36 100.206,-12.73 114.994,-12.73 126.719,-24.456 131.996,-24.456 LED107.3@132,-24.46
NetLED102_1: LED102.1 R310.2 | length 5.6
  Top Layer w0.3: R310.2@59.95,-27.76 59.95,-27.41 61.96,-25.4 LED102.1@61.96,-23
NetLED102_3: LED102.3 R320.2 | length 1.7
  Top Layer w0.3: LED102.3@67.04,-23 68.68,-23 R320.2@68.7,-22.98
NetLED103_1: LED103.1 R311.2 | length 7.5
  Top Layer w0.3: R311.2@57.49,-31.31 57.49,-32.53 LED103.1@61.96,-37
NetLED103_3: LED103.3 R321.2 | length 4.8
  Top Layer w0.3: LED103.3@67.04,-37 67.23,-37.19 R321.2@70.83,-37.19 70.83,-36.84 R321.2@70.43,-36.44
NetLED104_1: LED104.1 R312.2 | length 5.6
  Top Layer w0.75: R312.2@59.79,-50.05 59.76,-50.08 59.87,-50.19 R312.2@59.87,-50.26 61.12,-50.26 62.625,-48.755 64.205,-48.755 LED104.1@64.5,-48.46
NetLED104_3: LED104.3 R319.2 | length 2.6
  Top Layer w0.75: LED104.3@64.5,-53.54 64.505,-53.545 67.115,-53.545 R319.2@67.12,-53.55
NetLED105_A: LED105.A R313.1 | length 6.4
  Top Layer w0.3: R313.1@40.59,-59.74 40.697,-59.847 40.697,-62.467 LED105.A@43.23,-65
NetLED105_K: LED105.K U101.2 | length 75
  Top Layer w0.3: v2(91.53,-41) 91.53,-40.256 90.55,-39.276 90.55,-36.204 90.884,-35.87 99.35,-35.87 99.97,-35.25 U101.2@99.97,-33.72
  Bottom Layer w0.3: LED105.K@45.77,-65 45.77,-60.29 59.45,-46.61 77.917,-46.61 82.837,-41.69 90.586,-41.69 91.276,-41 v2(91.53,-41)
NetLED106_A: LED106.A LED108.A R307.1 U101.86 | length 185.6
  Top Layer w0.3: v2(59.75,-53.68) 59.65,-53.58 58.73,-53.58 58.33,-53.18 R307.1@58.33,-53.16 54.64,-53.16 54.6,-53.2 ; LED106.A@63.23,-65 54.6,-56.37 54.6,-53.2 ; U101.86@97.92,-25.17 95.284,-25.17 90.09,-19.976 90.09,-14.839 86.141,-10.89 72.836,-10.89 63.116,-20.61 61.8,-20.61 60.01,-22.4 60.01,-24.243 57.97,-26.283 57.97,-28.236 56.49,-29.716 56.49,-37.16 56.511,-37.181 56.511,-37.429 54.6,-39.34 54.6,-53.2
  Bottom Layer w0.3: v2(59.75,-53.68) 59.955,-53.68 61.295,-52.34 64.857,-52.34 64.867,-52.33 81.396,-52.33 86.116,-57.05 92.994,-57.05 94.483,-55.56 97.61,-52.434 101.733,-48.31 131.96,-48.31 LED108.A@133.27,-47
NetLED107_1: LED107.1 R316.1 | length 8.6
  Top Layer w0.3: R316.1@126.11,-24.46 127.998,-24.46 128.968,-25.43 128.976,-25.43 130.578,-27.031 130.578,-27.698 131.539,-28.659 131.539,-29.079 LED107.1@132,-29.54
NetLED201_1: LED201.1 R203.1 RJ201.7 | length 85.7
  Top Layer w0.3: R203.1@181.87,-61.57 184.8,-61.57 LED201.1@185.03,-61.8 185.68,-62.45 185.68,-63.08 186.81,-64.21 188.47,-64.21 189.282,-65.022 205.798,-65.022 232.64,-38.18 RJ201.7@232.64,-16.12
NetLED201_2: LED201.2 RJ201.8 U201.90 | length 95.4
  Top Layer w0.3: LED201.2@187.83,-61.8 187.83,-61.7 189.03,-60.5 189.03,-60.3 ; U201.90@191.14,-49.26 191.14,-52.774 189.03,-54.884 189.03,-60.3 ; RJ201.8@231.64,-13.62 231.47,-13.79 230.68,-14.58 230.68,-16.66 231.47,-17.45 231.47,-38.63 205.64,-64.46 192.71,-64.46 192,-63.75 192,-62.31 191.19,-61.5 190.23,-61.5 189.13,-60.4 189.03,-60.3
NetLED202_1: LED202.1 R204.1 | length 2.1
  Top Layer w0.3: R204.1@180.98,-54.056 LED202.1@183.049,-54.056
NetLED203_1: LED203.1 R205.1 | length 2.1
  Top Layer w0.3: R205.1@180.91,-58.91 182.936,-58.91 LED203.1@182.969,-58.943
NetP400_CCW: P400.CCW R404.1 U401.5 U402.6 | length 53.5
  Top Layer w0.3: P400.CCW@123.23,-28.62 123.23,-28.272 123.73,-27.772 124.068,-27.772 124.418,-27.422 124.418,-22.379 ; U402.6@125.59,-20.42 124.79,-20.42 124.04,-21.17 124.04,-22.001 124.418,-22.379 ; v2(134.862,-32.48) 134.728,-32.614 134.024,-32.614 133.217,-31.807 133.217,-26.247 132.72,-25.75 130.99,-25.75 127.68,-22.44 124.479,-22.44 124.418,-22.379 ; U401.5@136.92,-17.81 137.72,-17.81 138.97,-19.06 138.97,-22.055 140.76,-23.845 140.76,-26.84 139.76,-27.84 R404.1@139.76,-28.19 139.76,-28.836 142.424,-31.5 v2(142.46,-31.5)
  Bottom Layer w0.3: v2(134.862,-32.48) 135.842,-31.5 v2(142.46,-31.5)
NetP400_CW: P400.CW R408.1 | length 3
  Top Layer w0.3: P400.CW@125.53,-28.62 125.53,-28.27 126.03,-27.77 126.94,-27.77 127.41,-27.3 R408.1@127.76,-27.3
NetP400_W: P400.W R403.1 | length 22.4
  Top Layer w0.3: P400.W@124.38,-32.62 122.88,-31.12 122.13,-30.37 122.13,-27.434 123.77,-25.794 123.77,-22.999 123.54,-22.769 123.54,-19.973 123.9,-19.613 123.9,-17.709 124.629,-16.98 127.83,-16.98 128.59,-17.74 R403.1@128.94,-17.74
NetR102_2: R102.2 U101.91 U201.65 | length 155.6
  Top Layer w0.3: v2(79.3,-12.78) 79.3,-18.01 80.16,-18.87 80.16,-21.497 80.983,-22.32 81.864,-22.32 86.184,-26.64 89.32,-26.64 90.73,-28.05 R102.2@90.73,-29.4 91.59,-29.4 93.32,-27.67 U101.91@97.92,-27.67 ; v2@160.099,-16.51 160.926,-16.51 174.46,-30.044 174.46,-40.29 178.49,-44.32 179.816,-44.32 181.426,-42.71 U201.65@182.59,-42.71
  Bottom Layer w0.3: v2(79.3,-12.78) 80.38,-13.86 98.369,-13.86 100.159,-12.07 115.522,-12.07 118.912,-15.46 144.672,-15.46 144.752,-15.518 145.776,-16.27 159.54,-16.27 v2(159.71,-16.44)
NetR201_1: R201.1 U201.1 | length 4.8
  Top Layer w0.3: R201.1@196.65,-51.86 197,-51.86 197.67,-51.19 197.67,-47.71 U201.1@197.69,-47.71
NetR201_2: R201.2 R202.1 | length 2.9
  Top Layer w0.3: R201.2@196.65,-55.06 R202.1@199.58,-55.06